# Altium PCB PCB1.PcbDoc
Units mm, origin at the board's own origin, x right, y up, seen from the top; angles counter-clockwise.
Board outline 58 x 59 mm, 2 copper layers (Top Layer, Bottom Layer), stack 1.1 mm thick; 19 components, 17 nets, 62 pads, 3 vias.
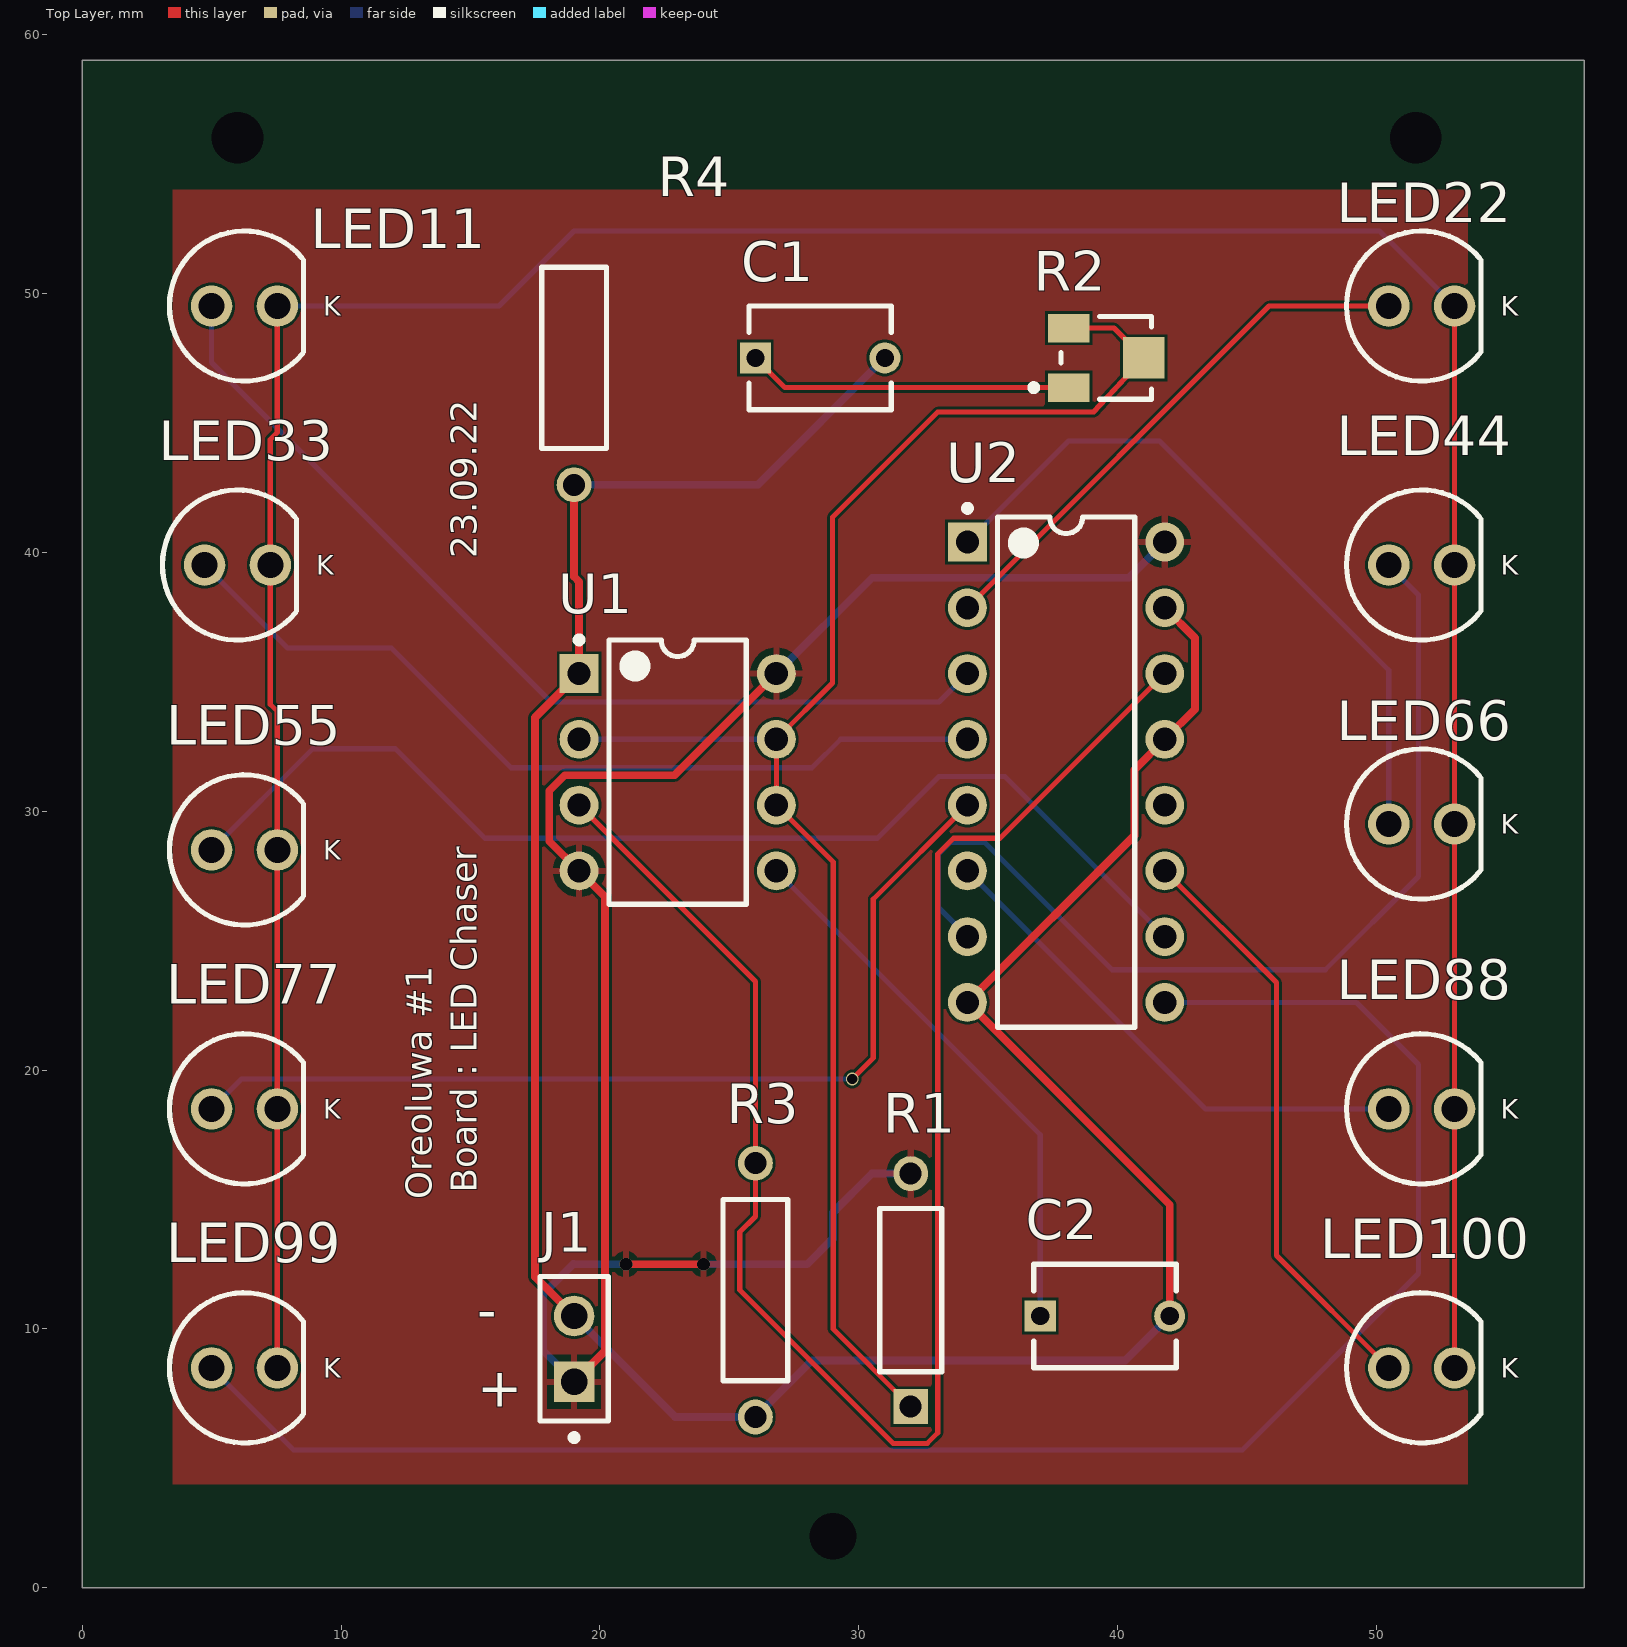
[diagram p0: Top Layer view]
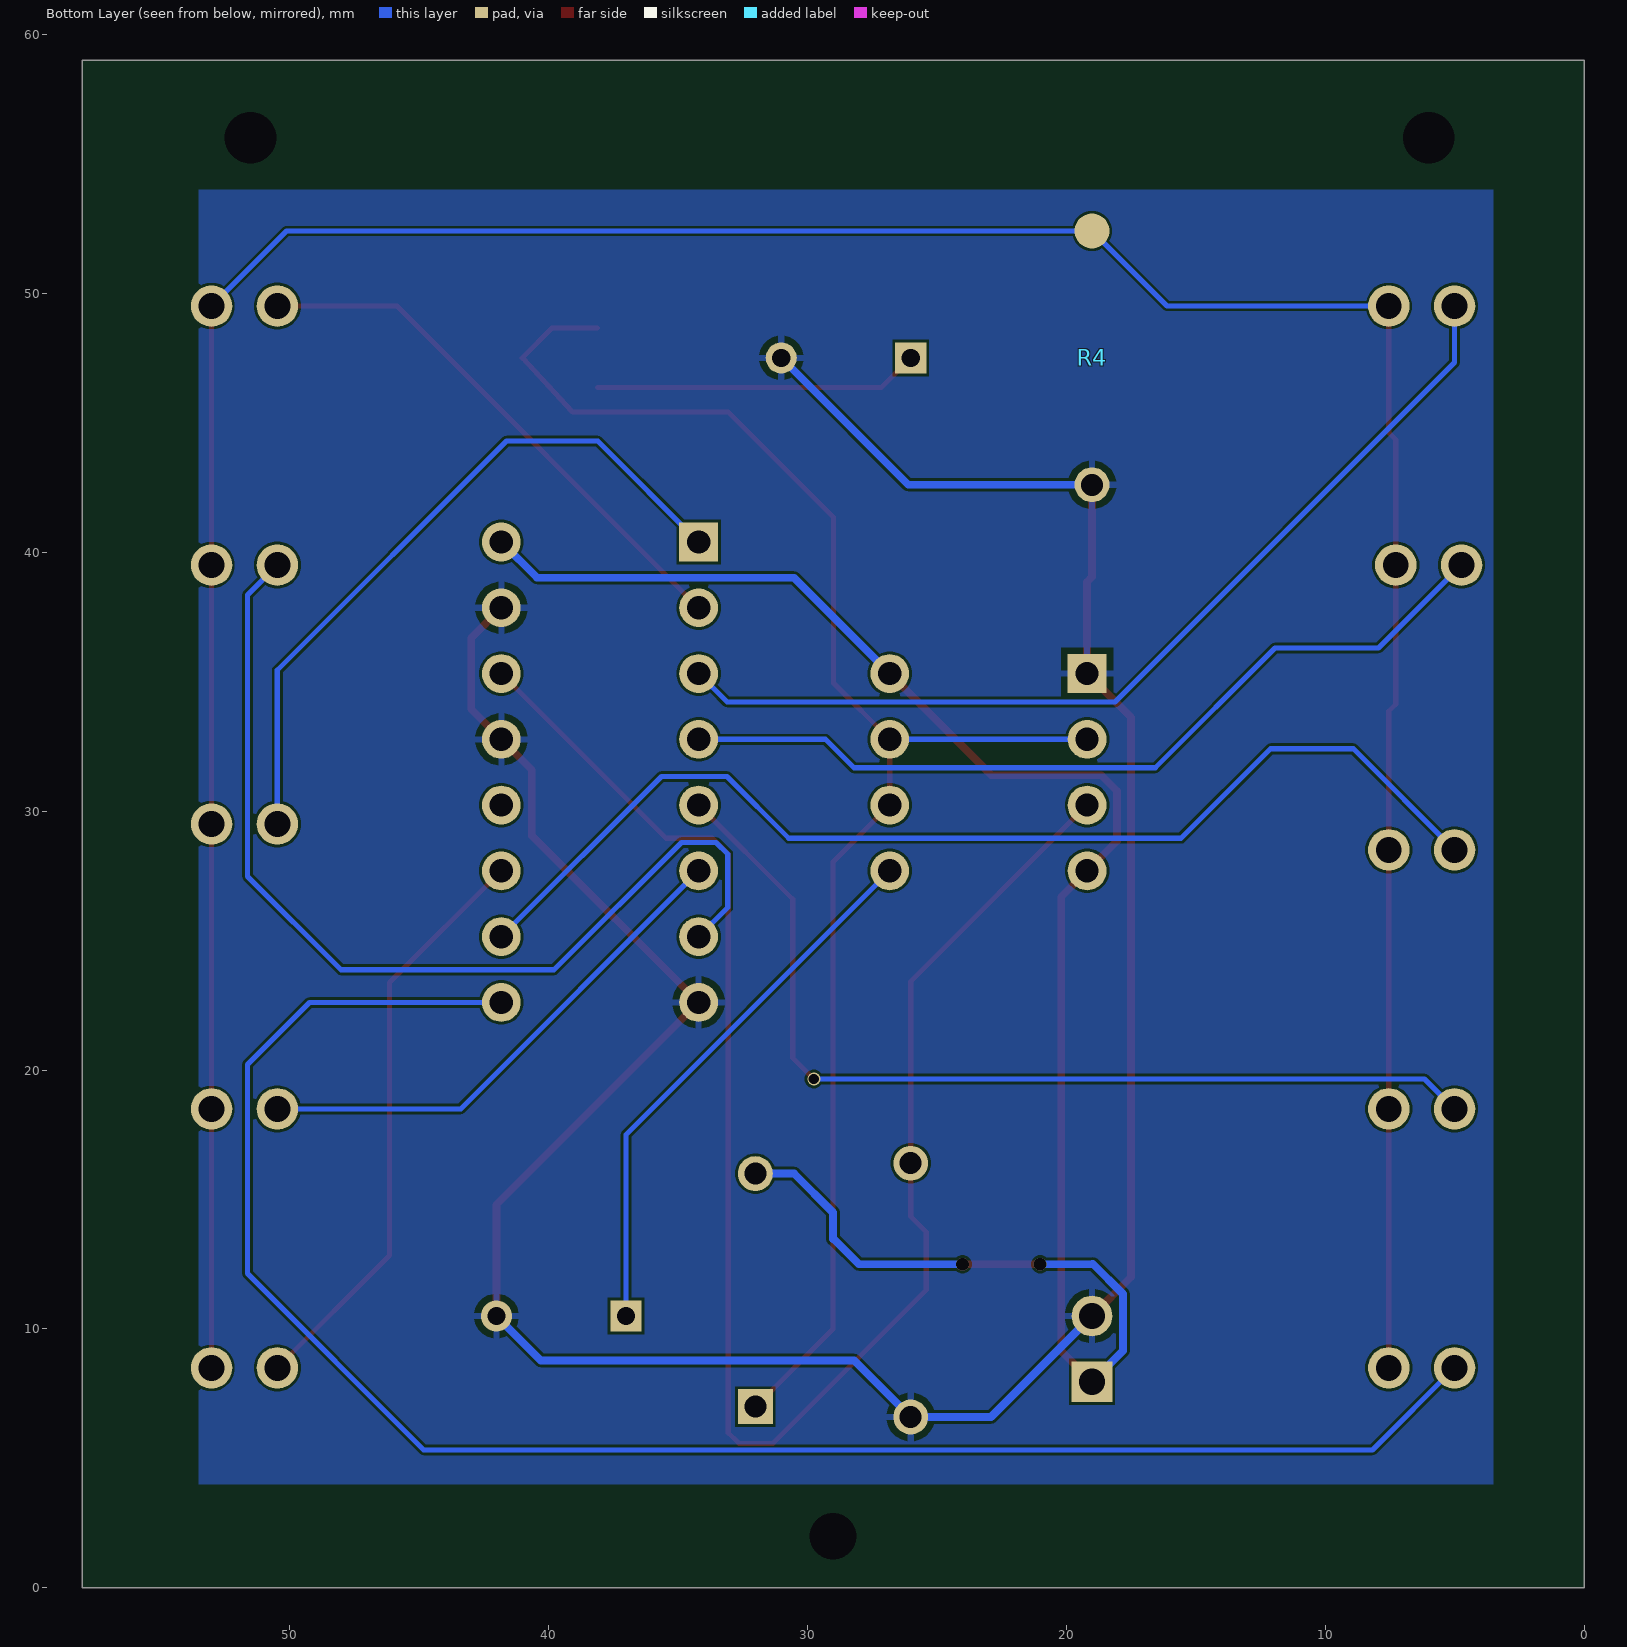
[diagram p1: Bottom Layer view, seen from below]
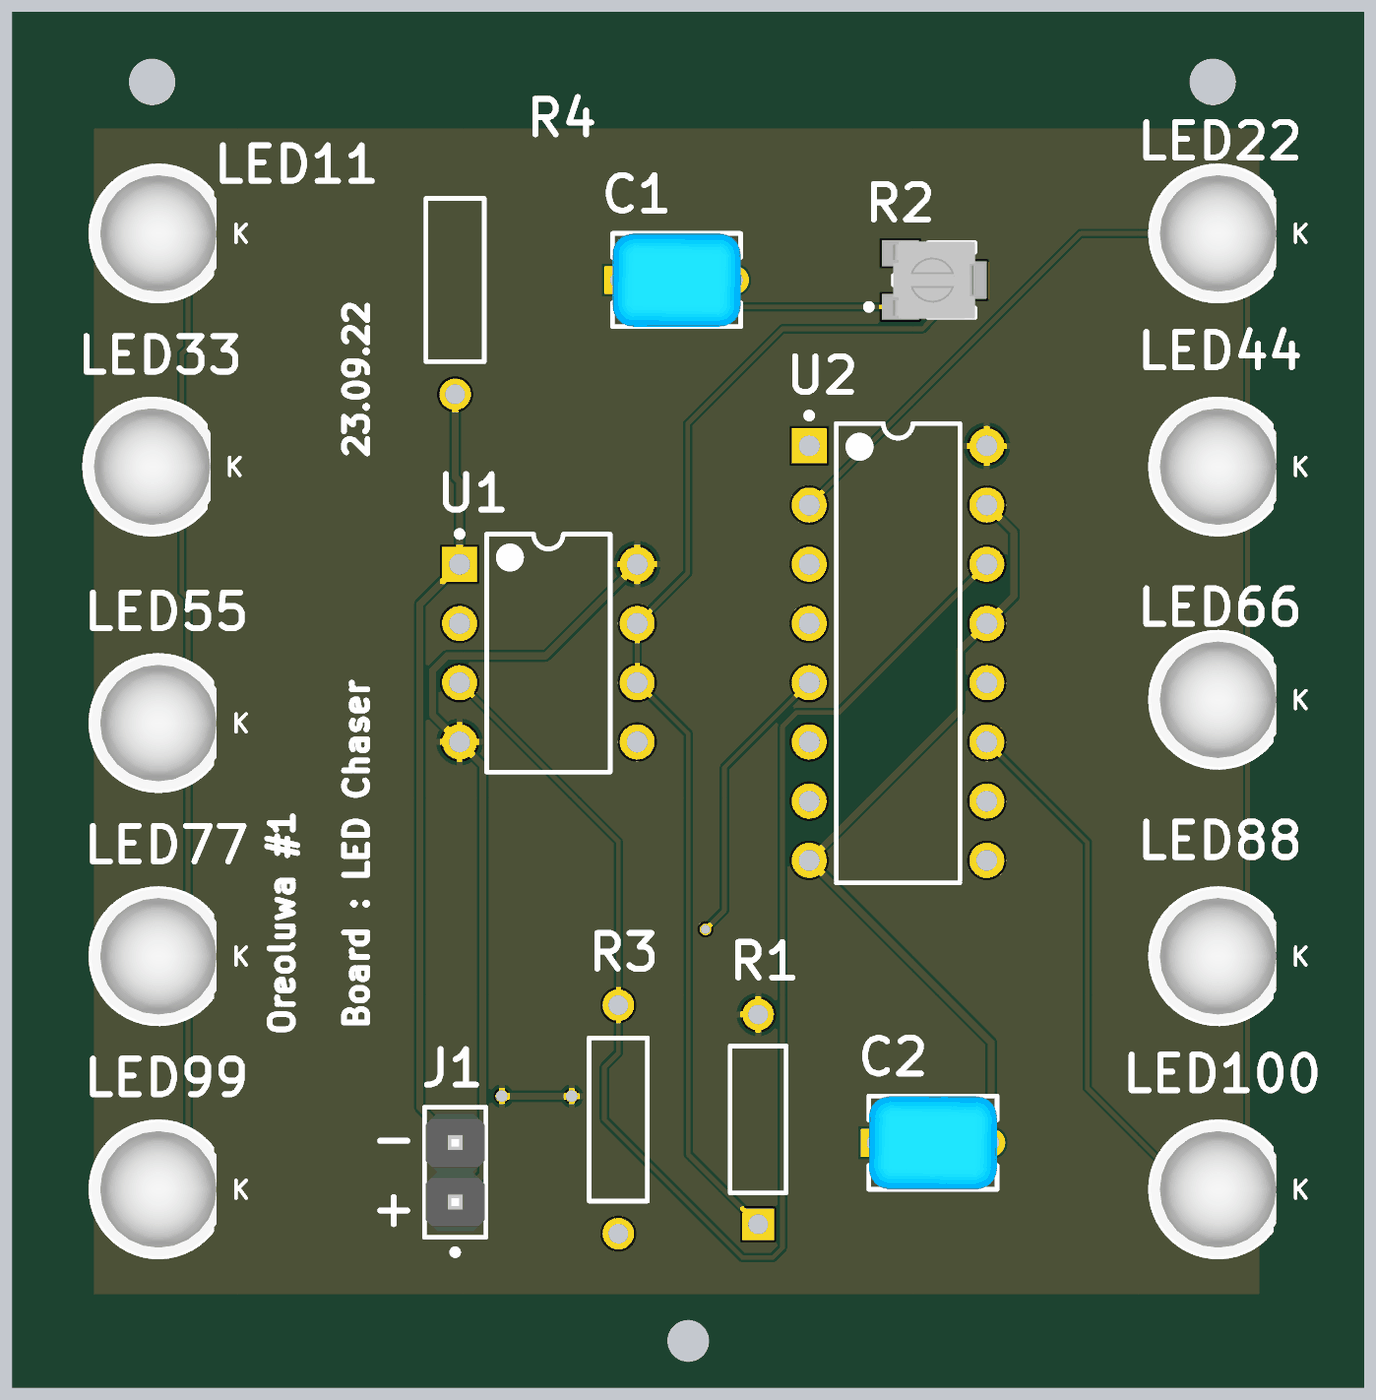
[diagram p2: 3D render of the assembled board from above, using the file's embedded part models]

## Layer stack, top to bottom
Top Solder: solder mask 0.05, Solder Resist, Dk 3.5
Top Layer: signal copper 0.1
Dielectric 1: dielectric 0.9, FR-4, Dk 4.8
Bottom Layer: signal copper 0.1
Bottom Solder: solder mask 0.05, Solder Resist, Dk 3.5

## Board outline
0,0 58,0 58,59 0,59

## Design rules (kind name [scope] priority, off if disabled: settings)
Clearance [All] p1: gap=0.1 ignorepadtopadclearanceinfootprint=FALSE
PolygonConnect [All] p1: connectstyle=Relief reliefconductorwidth=0.254 reliefentries=4 polygonreliefangle="90 Angle" airgapwidth=0.254
RoutingVias [All] p1: holewidth=0.4 width=0.5 viastyle="Through Hole" minholewidth=0.5 minwidth=0.5 maxholewidth=0.5 maxwidth=0.5
SilkToSilkClearance [All] p1: silktosilkclearance=0.1
SilkToSolderMaskClearance [IsPad] p1: minsilkscreentomaskgap=0.1 clearancetoexposedcopper=TRUE
SolderMaskExpansion [All] p1: expansion=0.102 istentingtop=FALSE
Width WidthPOW [(InNet('VCC') OR InNet('GND'))] p1: maxlimit=0.3 minlimit=0.2 preferedwidth=0.3
Width [All] p2: maxlimit=0.5 minlimit=0.1 preferedwidth=0.2
28 further rules are at their usual default settings.

## Components (designator, comment, footprint, x,y, rotation, side; value= is the part's Value field where it differs from the comment)
C1 "RCER71E226MWM1H03A" FP-RCEWM1-MFG 28.5,47.5 r0 top
C2 "RCER71E226MWM1H03A" FP-RCEWM1-MFG 39.5,10.5 r0 top
J1 "M20-9990246" FP-M20-9990246-MFG 19,9.23 r90 top
LED11 "151051BS04000" "Type 5mm" 6.27,49.5 r0 top
LED22 "151051BS04000" "Type 5mm" 51.73,49.5 r0 top
LED33 "151051BS04000" "Type 5mm" 6,39.5 r0 top
LED44 "151051BS04000" "Type 5mm" 51.73,39.5 r0 top
LED55 "151051BS04000" "Type 5mm" 6.27,28.5 r0 top
LED66 "151051BS04000" "Type 5mm" 51.73,29.5 r0 top
LED77 "151051BS04000" "Type 5mm" 6.27,18.5 r0 top
LED88 "151051BS04000" "Type 5mm" 51.73,18.5 r0 top
LED99 "151051BS04000" "Type 5mm" 6.27,8.5 r0 top
LED100 "151051BS04000" "Type 5mm" 51.73,8.5 r0 top
R1 "MFR-25FBF52-100K" RESA60-630X240 32,11.5 r90 top
R2 "3313J-1-503E" BOUR-3313J-1_V 39.55,47.5 r0 top
R3 "OD103JE" OMTE-RES7X2.5-2#1 26,11.5 r90 top
R4 "OD103JE" OMTE-RES7X2.5-2#2 19,47.5 r90 top
U1 "NE555P" P0008A 23,31.5 r0 top
U2 "CD74HC4017E" N0016A 38,31.5 r0 top

## Footprints (in the part's own frame and the unit in brackets; to place one, negate y for a bottom-side part, rotate by r counter-clockwise, add the part's x,y. Pads: shape width x height; smd on the part's side, far side on the other; paste and mask are expansions set on the pad)
BOUR-3313J-1_V [mm] "SMD, 3-Leads, Body 3.5x3.2mm, Pitch 1.15mm"
  rect 1.6x1.1 smd paste+0: 1(-1.45,-1.15) 3(-1.45,1.15)
  rect 1.6x1.6 smd paste+0: 2(1.45,0)
  silkscreen extent -2.92,-1.6 1.75,1.6, body extent -1.75,-1.65 1.75,1.65, height 2.11
FP-M20-9990246-MFG [mm]
  rect 1.57x1.57 hole 1.02 paste-1000 mask+0: 1(-1.27,0)
  round 1.57 hole 1.02 paste-1000 mask+0: 2(1.27,0)
  silkscreen extent -3.55,-1.32 2.79,1.32, body extent -2.89,-1.42 2.89,1.42, height 0.25
FP-RCEWM1-MFG [mm]
  rect 1.2x1.2 hole 0.7 paste-1000 mask+0: 1(-2.5,0)
  round 1.2 hole 0.7 paste-1000 mask+0: 2(2.5,0)
  silkscreen extent -2.75,-2 2.75,2, body extent -3.2,-2.1 3.2,2.1, height 0.25
N0016A [mm] "DIP, 16-Leads, Body 19.7x6.6mm, Pitch 2.54mm"
  rect 1.5x1.5 hole 0.9: 1(-3.81,8.89)
  round 1.5 hole 0.9: 2(-3.81,6.35) 3(-3.81,3.81) 4(-3.81,1.27) 5(-3.81,-1.27) 6(-3.81,-3.81) 7(-3.81,-6.35) 8(-3.81,-8.89) 9(3.81,-8.89) 10(3.81,-6.35) 11(3.81,-3.81) 12(3.81,-1.27) 13(3.81,1.27) 14(3.81,3.81) 15(3.81,6.35) 16(3.81,8.89)
  silkscreen extent -3.93,-9.85 2.65,10.31, body extent -3.95,-9.85 3.95,9.85, height 5.08
OMTE-RES7X2.5-2#1 [mm] "Resistor, Axial; Body 7x2.5mm, Lead Dia. 0.6mm"
  round 1.35 hole 0.85: 1(-4.9,0) 2(4.9,0)
  silkscreen extent -3.5,-1.25 3.5,1.25, body extent -3.5,-1.25 3.5,1.25, height 2.5
OMTE-RES7X2.5-2#2 [mm] "Resistor, Axial; Body 7x2.5mm, Lead Dia. 0.6mm"
  round 1.35 hole 0.85: 1(-4.9,0)
  round 1.35 smd far side: 2(4.9,0)
  silkscreen extent -3.5,-1.25 3.5,1.25, body extent -3.5,-1.25 3.5,1.25, height 2.5
P0008A [mm] "DIP, 8-Leads, Body 10.15x6.6mm, Pitch 2.54mm"
  rect 1.5x1.5 hole 0.9: 1(-3.81,3.81)
  round 1.5 hole 0.9: 2(-3.81,1.27) 3(-3.81,-1.27) 4(-3.81,-3.81) 5(3.81,-3.81) 6(3.81,-1.27) 7(3.81,1.27) 8(3.81,3.81)
  silkscreen extent -3.93,-5.1 2.65,5.23, body extent -3.95,-5.07 3.95,5.07, height 5.08
RESA60-630X240 [mm] "Axial Resistor, 2-Leads, Dia 2.4mm, Body Length 6.3mm"
  rect 1.35x1.35 hole 0.85: 1(-4.5,0)
  round 1.35 hole 0.85: 2(4.5,0)
  silkscreen extent -3.15,-1.2 3.15,1.2, body extent -3.15,-1.2 3.15,1.2, height 2.4
"Type 5mm" [mm] "THT, LED-5mm, 2pin- Body 5.8mm"
  round 1.6 hole 1: 1(1.27,0) 2(-1.27,0)
  silkscreen extent -2.9,-2.9 2.29,2.9, body extent -2.9,-2.9 2.5,2.9, height 11.7

## Part data
C1: library part CMP-06035-003622-1, "CAP CER 22UF 25V X7R RADIAL", Capacitance=22uF, Case/Package=Radial, Dielectric=X7R, Max Operating Temperature=125°C, Min Operating Temperature=-55°C, Package Quantity=1500, Ratings=AEC-Q200, Resistor Type=Ceramic, Tolerance=20%, Voltage Rating=25V, Height=7.5mm, Height - Seated (Max)=0.295inch, Lead Diameter=0.5mm, Lead Pitch=0.197inch, Lead/Base Style="Formed Leads", Length=0.217inch, Mount="Through Hole", Packaging="Tape and Reel", Termination=Radial, Voltage Rating (DC)=25V, Width=0.157inch
C2: library part CMP-06035-003622-1, "CAP CER 22UF 25V X7R RADIAL", Capacitance=10nF, Case/Package=Radial, Dielectric=X7R, Max Operating Temperature=125°C, Min Operating Temperature=-55°C, Package Quantity=1500, Ratings=AEC-Q200, Resistor Type=Ceramic, Tolerance=20%, Voltage Rating=25V, Height=7.5mm, Height - Seated (Max)=0.295inch, Lead Diameter=0.5mm, Lead Pitch=0.197inch, Lead/Base Style="Formed Leads", Length=0.217inch, Mount="Through Hole", Packaging="Tape and Reel", Termination=Radial, Voltage Rating (DC)=25V, Width=0.157inch
J1: library part CMP-15831-000009-1, "CONN HEADER VERT 2POS 2.54MM", Current Rating=3A, Manufacturer=Harwin, Temperature="-40°C to +105°C", Temperature Range High=+105°C, Temperature Range Low=-40°C, Automotive=No, Category=Conn, ComponentLink2Description=Datasheet, ComponentLink2URL=https://cdn.harwin.com/pdfs/M20-999.pdf, Conn Gender=Male, Conn Orientation=Vertical, Contact Material=Tin,Nickel, Device Class L1=Connectors, Device Class L2="Headers and Wire Housings", Device Class L3=unset, Digikey Description="CONN HEADER VERT 2POS 2.54MM", Height=8.99mm, Lead Free=Yes, Manufacturer Part Number=M20-9990246, Mouser Description="2.54mm (0.1\") Pitch SIL Vertical PC Tail Pin Header, 6.1mm mating pin height, tin, 2 contacts", Number Of Contacts=2, Number Of Rows=1, Octopart=https://octopart.com/m20-9990246-harwin-2590635, Package=M20-9990246, Pitch=2.54mm, RoHS=TRUE
LED11 LED22 LED33 LED44 LED55 LED66 LED77 LED88 LED99 LED100: library part CMP-1488-00009-1, "THT LED round mono-color color lens, WL-TMRW, Blue", Emitting color=Blue, Manufacturer="Wuerth Elektronik", ComponentLink1Description="Manufacturer URL", ComponentLink1URL=http://www.we-online.com, ComponentLink2Description=Datasheet, ComponentLink2URL=http://katalog.we-online.de/pbs/datasheet/7448042001.pdfhttp://katalog.we-online.de/pbs/datasheet/7448042001.pdfhttp://katalog.we-online.de/pbs/datasheet/7448042001.pdfhttp://katalog.we-online.de/pbs/datasheet/151051BS04000.pdf, PackageReference="Type 5mm", PartNumber=151051BS04000
R1: library part CMP-1659-00073-1, "Axial Resistor, 100 KOhm, +/- 1%, 0.25 W, -55 to 155 degC, 2-Pin THD, RoHS, Bulk", Case\Package=Axial, Max Operating Temperature="155 degC", Min Operating Temperature="-55 degC", Package Quantity=200, Power Rating="250 mW", Resistance="1M Ohm", Tolerance=1%, Voltage Rating="250 V", ComponentLink1Description="Manufacturer URL", ComponentLink1URL=http://www.yageo.com/, ComponentLink2Description=Datasheet, ComponentLink2URL=http://www.yageo.com/documents/recent/Yageo%20LR_MFR_2013.pdf, DatasheetVersion=Apr-13, Length="0.248 inch", Mount="Through Hole", PackageDescription="2-Pin Axial Lead, Dia 2.4 mm, Body Length 6.3 mm", PackageReference=MFR-25, Packaging=Bulk, RoHSCompliant=true
R2: library part CMP-2000-05588-1, "3 mm Trimpot(R) Trimming Potentiometer, 50 KOhm, +/- 20%, 0.125 W, -55 to 125 degC, 3-Pin SMD, RoHS, Tape and Reel", Manufacturer=Bourns, Package Description="3-Pin Surface Mount Device, Body 3.5 x 3.2 mm, Pitch 1.15 mm", Package Reference=3313J-1, Power Rating=125mW, Resistance Tolerance=±20%, Temperature Coefficient=±150ppm/°C, Track Resistance=50kohm, Datasheet URL=http://www.bourns.com/docs/Product-Datasheets/3313.pdf, Datasheet Version=05/2016, Manufacturer URL=http://www.bourns.com/, Mounting Technology=SurfaceMount, No. of Turns=1, Potentiometer Mounting=SMD, SVHC=NoSVHC(19-Dec-2012)
R3 R4: library part CMP-2000-06865-1, "Little Demon(R) Carbon Composition Molded OD Series, 250 V, 10 KOhm, +/-5%, -70 to 130 degC, 2-Pin THD, RoHS, Bulk", Manufacturer=Ohmite, Operating Temperature=-, Package / Case=Axial, Package Description="2-Pin THD Resistor, Body 7 x 2.5 mm, Lead Dia. 0.6 mm", Package Reference=RES7X2.5, Power (Watts)=0.25W,1/4W, Power Rating=0.25W, Resistance (Ohms)=10k, Standard Package=100, Tolerance=±5%, Catalog Drawings=OD,OF,OASeries, Category=Resistors, Composition=CarbonComposition, Datasheet URL=http://www.ohmite.com/cat/res_od_of_oa.pdf, Datasheet Version=06/2016, EDA / CAD Models=DownloadfromAcceleratedDesigns, Family=ThroughHoleResistors, Features=PulseWithstanding, Height=-, Manufacturer URL=http://www.ohmite.com/, Mounting Technology=ThroughHole, Number of Terminations=2, Online Catalog=OD,OF,OASeries,LittleDemon®, Packaging=Bulk, PartNumber=OD103JE, RoHS Information="LittleDemon\"E\"SeriesMaterialDeclaration", Series=LittleDemon®OD, Size / Dimension="0.098\"Diax0.276\"L(2.50mmx7.00mm)", Supplier Device Package=Axial, Temperature Coefficient=-
U1: library part CMP-2000-04954-1, "Precision Timer, 4.5 to 16 V, 0 to 70 degC, 8-Pin DIP, Pb-Free, Tube", Manufacturer=TexasInstruments, Maximum High Level Output Current=-200mA, Maximum Low Level Output Current=200mA, Operating Supply Voltage=5, Package=8PDIP, Package Description="8-Pin Double In-line Package, Body 9.59 x 6.35 mm, Pitch 2.54 mm", Package Reference=P8, Category=Timer, Datasheet URL=http://www.ti.com/general/docs/lit/getliterature.tsp?genericPartNumber=NE555&fileType=pdf, Datasheet Version="Rev. I, 09/2014", Manufacturer URL=http://www.ti.com/, Number of Internal Timers=1, Package URL=http://www.ti.com/lit/ml/mpdi001b/mpdi001b.pdf, Packaging=Rail/Tube, Rad Hard=No, Type=Standard
U2: library part CMP-1623-00548-2, "High Speed CMOS Logic Decade Counter/Divider with 10 Decoded Outputs, N0016A, TUBE", F @ Nom Voltage(Max)(Mhz)=28, Generic Part Number=CD74HC4017, ICC @ Nom Voltage(Max)(mA)=0.08, Manufacturer="Texas Instruments", Operating Temperature Range(C)="-55 to 125", Rating=Catalog, tpd @ Nom Voltage(Max)(ns)=54, Voltage(Nom)(V)=3.3,5, Bits(#)=10, Code_JEDEC=MS-001, DatasheetVersion=SCHS200D, Function=Counter, Input Type=LVTTL/CMOS, Inputs=1, Output Drive (IOL/IOH)(Max)(mA)=5.2/-5.2, Output Type=CMOS, PackageReference=N0016A, Schmitt Trigger=No, Technology Family=HC, Type=Decade, VCC(Max)(V)=6, VCC(Min)(V)=2

## Free pads (board coordinates)
  round 1.524 hole 2 unplated: 1(6,56) 2(51.5,56)
  round 1.524 hole 1.8 unplated: 3(29,2)

## Via types
v1: diameter 0.5, hole 0.5, Top Layer to Bottom Layer, 2 vias
v2: diameter 0.5, hole 0.4, Top Layer to Bottom Layer, 1 vias

## Nets (pads, with @x,y where several pads share a name; then routed paths per layer and width w, separated by ;. In a path a pad name is that pad's centre, name@x,y a point inside that pad or via, vN(x,y) a via of type N, cw(c..) or ccw(c..) an arc to the next point about the centre after c; other vN are vias at no path point)
GND: C1.2 C2.2 J1.2 R3.1 R4.1 U1.1 U2.8 U2.13 U2.15 | length 108.5
  Top Layer w0.3: J1.2 17.49,12.01 17.49,33.61 U1.1 19.19,38.857 19,39.047 R4.1 ; U2.15 42.975,36.685 42.975,33.935 U2.13 40.639,31.599 40.639,29.059 U2.8 42,14.8 C2.2
  Bottom Layer w0.3: J1.2 22.9,6.6 R3.1 28.184,8.784 40.284,8.784 C2.2 ; R4.1 26.1,42.6 C1.2
NetC1_1: C1.1 R2.1 | length 12.6
  Top Layer w0.2: C1.1 27.15,46.35 R2.1
NetC2_1: C2.1 U1.5 | length 21.4
  Bottom Layer w0.2: U1.5 37,17.5 C2.1
NetLED11_1: LED11.1 LED22.1 LED33.1 LED44.1 LED55.1 LED66.1 LED77.1 LED88.1 LED99.1 LED100.1 R4.2 | length 130.1
  Top Layer w0.2: LED99.1 LED77.1 LED55.1 7.54,33.853 7.27,34.123 LED33.1 7.27,44.344 7.54,44.614 LED11.1 ; LED100.1 LED88.1 LED66.1 LED44.1 LED22.1
  Bottom Layer w0.2: LED11.1 16.1,49.5 R4.2 50.1,52.4 LED22.1
NetLED11_2: LED11.2 U2.3 | length 37.3
  Bottom Layer w0.2: LED11.2 5,47.318 18.109,34.209 33.089,34.209 U2.3
NetLED22_2: LED22.2 U2.2 | length 21.1
  Top Layer w0.2: U2.2 45.84,49.5 LED22.2
NetLED33_2: LED33.2 U2.4 | length 33.2
  Bottom Layer w0.2: LED33.2 7.938,36.292 11.937,36.292 16.559,31.669 28.193,31.669 29.294,32.77 U2.4
NetLED44_2: LED44.2 U2.7 | length 38.4
  Bottom Layer w0.2: U2.7 33.069,26.271 33.069,28.342 33.518,28.79 34.856,28.79 39.775,23.871 48.005,23.871 51.611,27.478 51.611,38.349 LED44.2
NetLED55_2: LED55.2 U2.10 | length 43.4
  Bottom Layer w0.2: LED55.2 8.906,32.406 12.106,32.406 15.56,28.951 30.711,28.951 33.09,31.33 35.63,31.33 U2.10
NetLED66_2: LED66.2 U2.1 | length 27.5
  Bottom Layer w0.2: U2.1 38.087,44.287 41.61,44.287 50.46,35.437 LED66.2
NetLED77_2: LED77.2 U2.5 | length 37.6
  Top Layer w0.2: v2(29.742,19.655) 30.555,20.468 30.555,26.595 U2.5
  Bottom Layer w0.2: LED77.2 6.155,19.655 v2(29.742,19.655)
NetLED88_2: LED88.2 U2.6 | length 20.1
  Bottom Layer w0.2: U2.6 43.38,18.5 LED88.2
NetLED99_2: LED99.2 U2.9 | length 69.6
  Bottom Layer w0.2: LED99.2 8.171,5.329 44.804,5.329 51.611,12.136 51.611,20.214 49.215,22.61 U2.9
NetLED100_2: LED100.2 U2.11 | length 22.8
  Top Layer w0.2: U2.11 46.125,23.375 46.125,12.835 LED100.2
NetR1_1: R1.1 R2.2 R2.3 U1.2 U1.6 U1.7 | length 63
  Top Layer w0.2: R1.1 29.005,9.995 29.005,28.035 U1.6 U1.7 28.98,34.94 28.98,41.346 33.044,45.41 39.064,45.41 R2.2 39.85,48.65 R2.3
  Bottom Layer w0.2: U1.2 U1.7
NetR3_2: R3.2 U1.3 U2.14 | length 66.1
  Top Layer w0.2: U1.3 26,23.42 R3.2 26,14.349 25.4,13.749 25.4,11.5 31.317,5.583 32.638,5.583 33.044,5.99 33.044,28.342 33.654,28.951 35.451,28.951 U2.14
VCC: J1.1 R1.2 U1.4 U1.8 U2.16 | length 72.6
  Top Layer w0.3: J1.1 20.192,9.152 20.192,26.688 U1.4 18.04,28.84 18.04,30.78 18.64,31.38 22.88,31.38 U1.8 ; v1(21,12.5) v1(24,12.5)
  Bottom Layer w0.3: J1.1 17.804,9.156 17.804,11.349 18.978,12.523 19,12.5 v1(21,12.5) ; v1(24,12.5) 28,12.5 28.973,13.473 29,13.473 29,14.5 30.5,16 R1.2 ; U1.8 30.51,39.01 40.43,39.01 U2.16
pads on no net: U2.12

## Polygon pours and split planes (outlines as drawn)
GND on Bottom Layer "GND_L02_P002" (solid, remove dead copper, pour order 2): 3.5,54 53.5,54 53.5,4 3.5,4
VCC on Top Layer "VCC_L01_P006" (solid, remove dead copper, pour order 6): 3.5,54 3.5,4 53.5,4 53.5,54

## Silkscreen, mask and mechanical layers (free items; w line width, h text height)
Top Overlay:
  text "23.09.22" at 15.246,39.754 h1 r90
  text "Board : LED Chaser" at 15.246,15.254 h1 r90
  text "Oreoluwa #1" at 13.5,15 h1 r90
  text "-" at 15.254,9.992 h1.52
  text "+" at 15.254,7 h1.52

## Text inside footprints (layer, text, board x,y; h text height)
LED11: Top Overlay "K" at 9.318,49.119 h0.76; Top Courtyard "K" at 9.318,49.119 h0.76
LED22: Top Overlay "K" at 54.778,49.119 h0.76; Top Courtyard "K" at 54.778,49.119 h0.76
LED33: Top Overlay "K" at 9.048,39.119 h0.76; Top Courtyard "K" at 9.048,39.119 h0.76
LED44: Top Overlay "K" at 54.778,39.119 h0.76; Top Courtyard "K" at 54.778,39.119 h0.76
LED55: Top Overlay "K" at 9.318,28.119 h0.76; Top Courtyard "K" at 9.318,28.119 h0.76
LED66: Top Overlay "K" at 54.778,29.119 h0.76; Top Courtyard "K" at 54.778,29.119 h0.76
LED77: Top Overlay "K" at 9.318,18.119 h0.76; Top Courtyard "K" at 9.318,18.119 h0.76
LED88: Top Overlay "K" at 54.778,18.119 h0.76; Top Courtyard "K" at 54.778,18.119 h0.76
LED99: Top Overlay "K" at 9.318,8.119 h0.76; Top Courtyard "K" at 9.318,8.119 h0.76
LED100: Top Overlay "K" at 54.778,8.119 h0.76; Top Courtyard "K" at 54.778,8.119 h0.76